# Altium PCB main.PcbDoc
Units mm, origin at the board's own origin, x right, y up, seen from the top; angles counter-clockwise.
Board outline 55.88 x 52.07 mm, 2 copper layers (Top Layer, Bottom Layer); 13 components, 41 nets, 136 pads, 63 vias.
Unrouted connection lines stored in the file: 1.
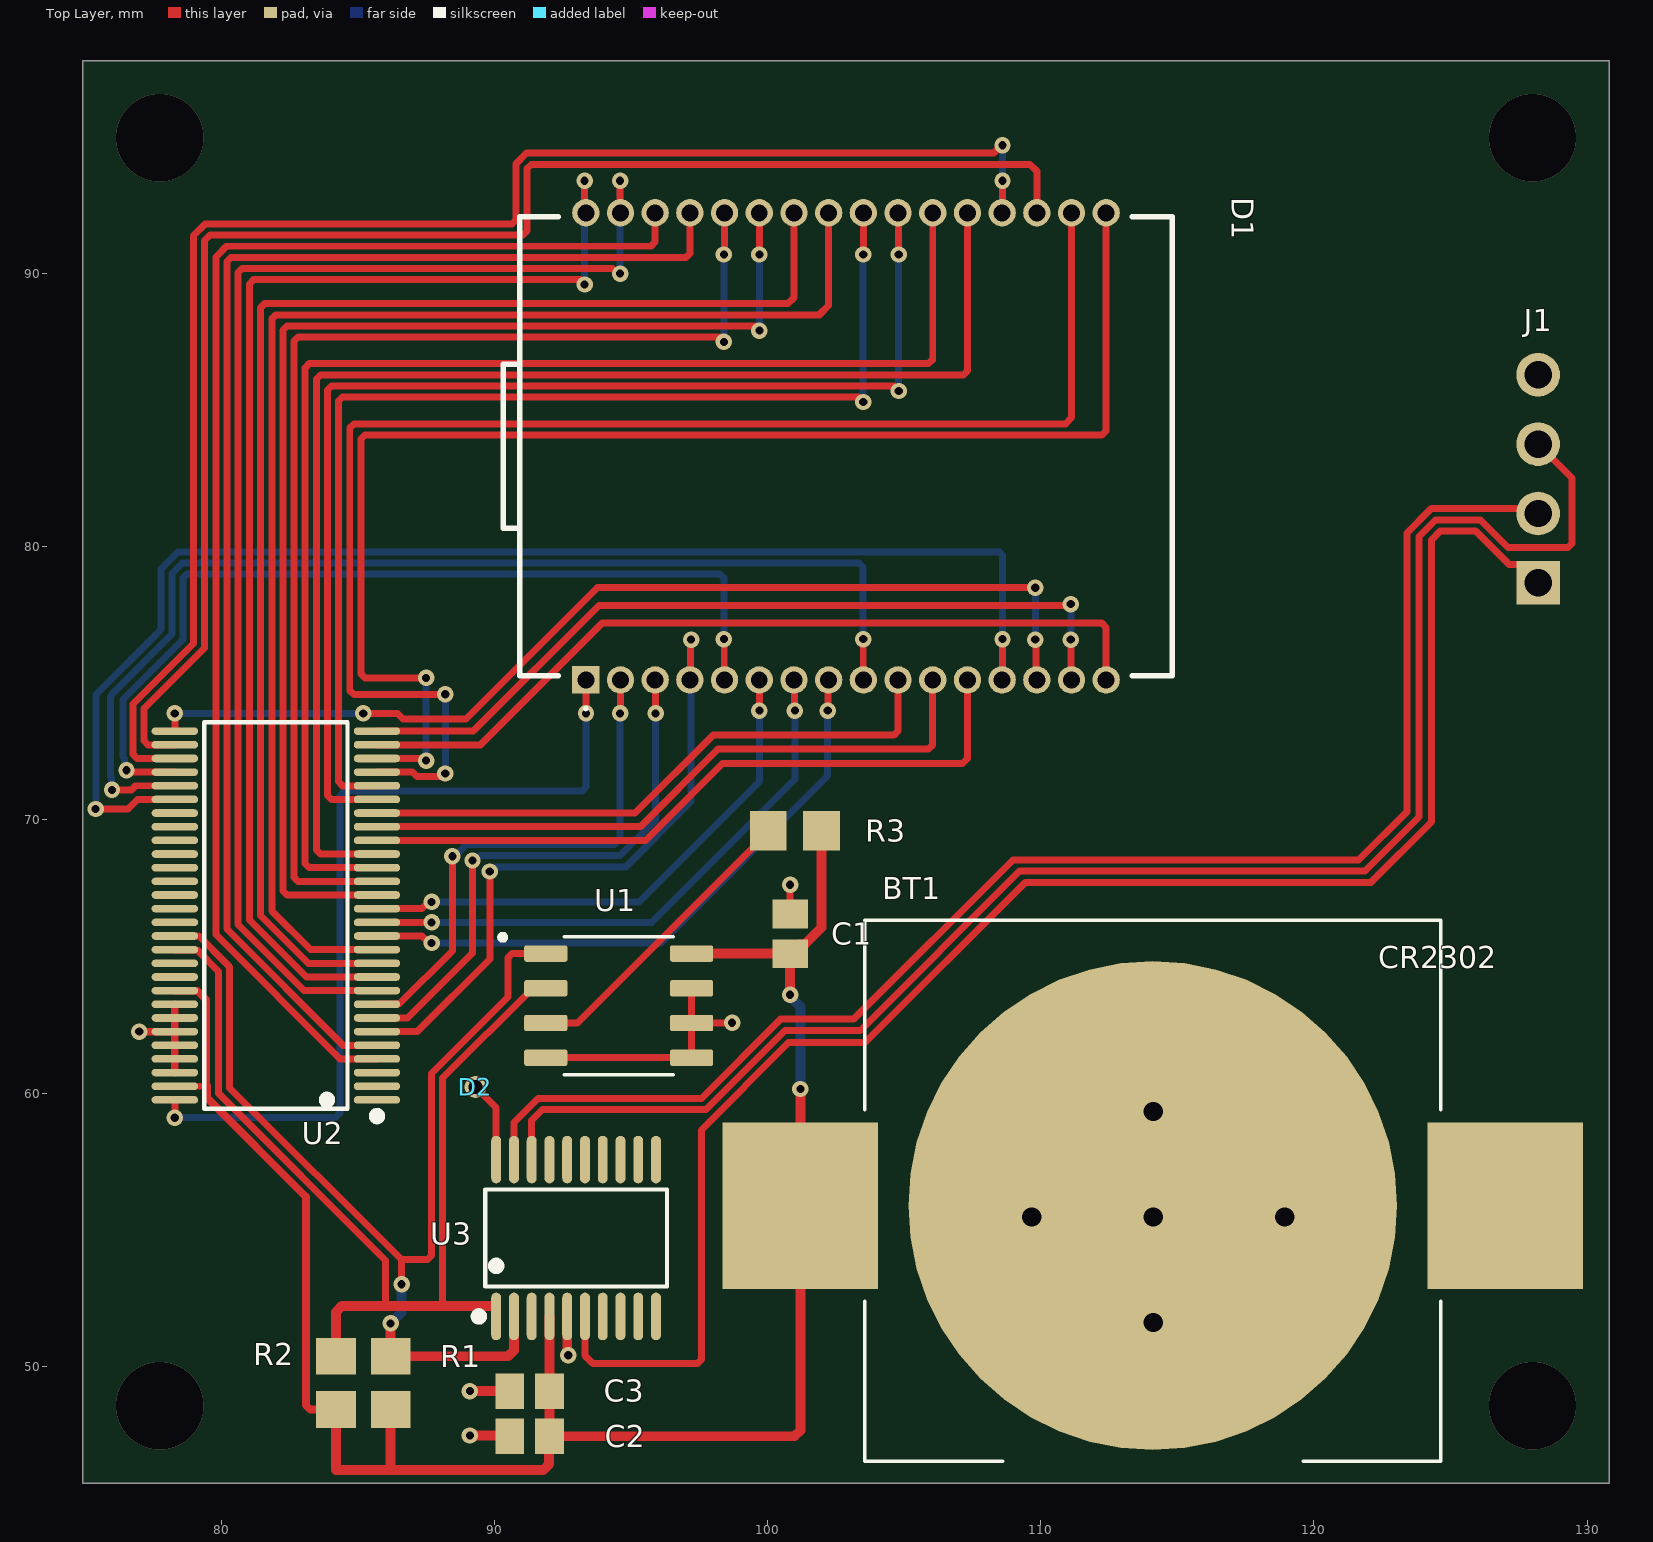
[diagram p0: Top Layer view]
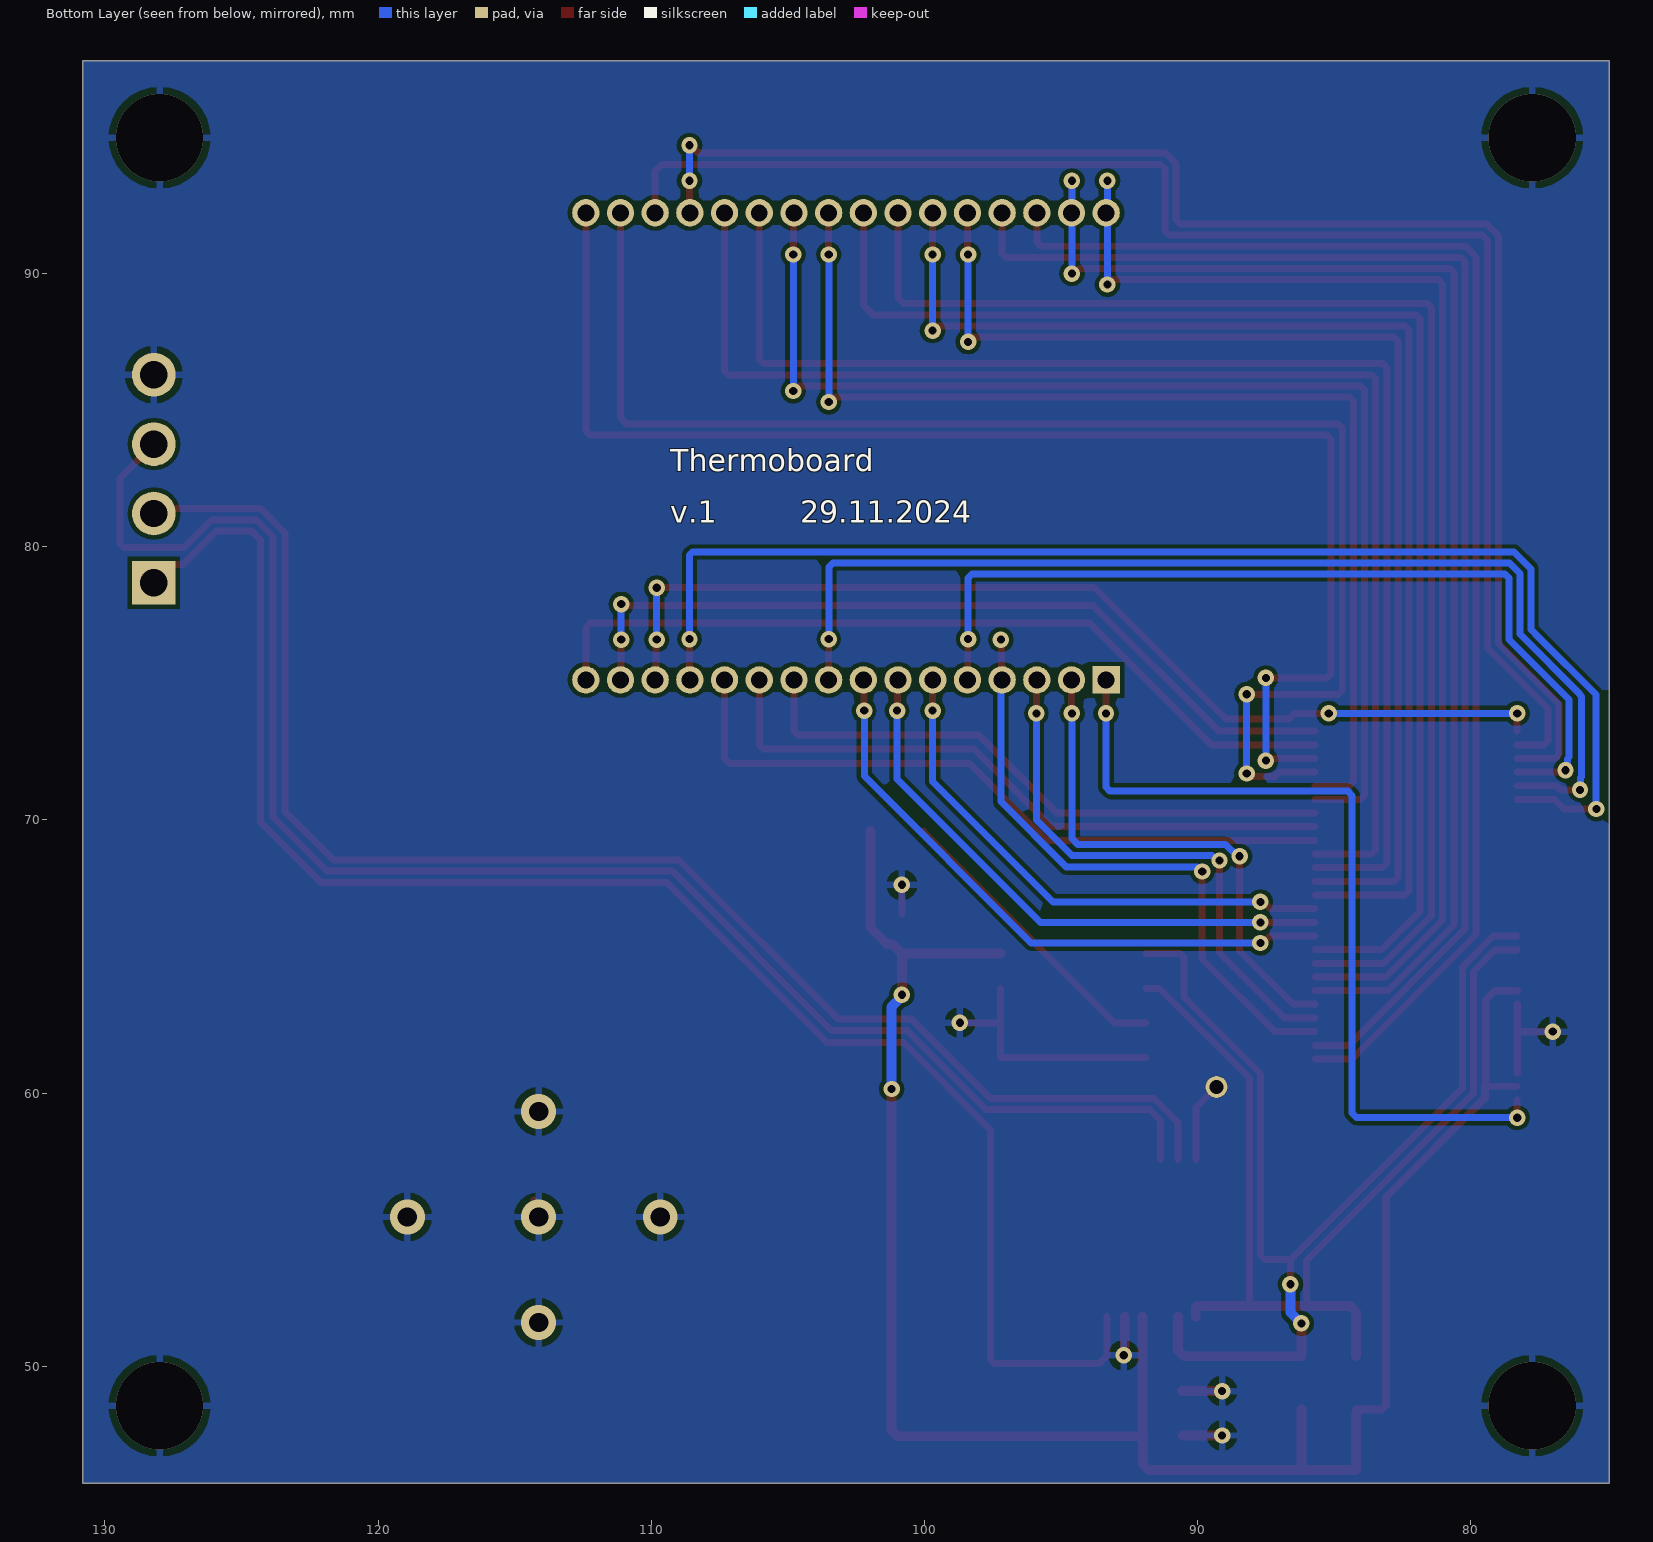
[diagram p1: Bottom Layer view, seen from below]
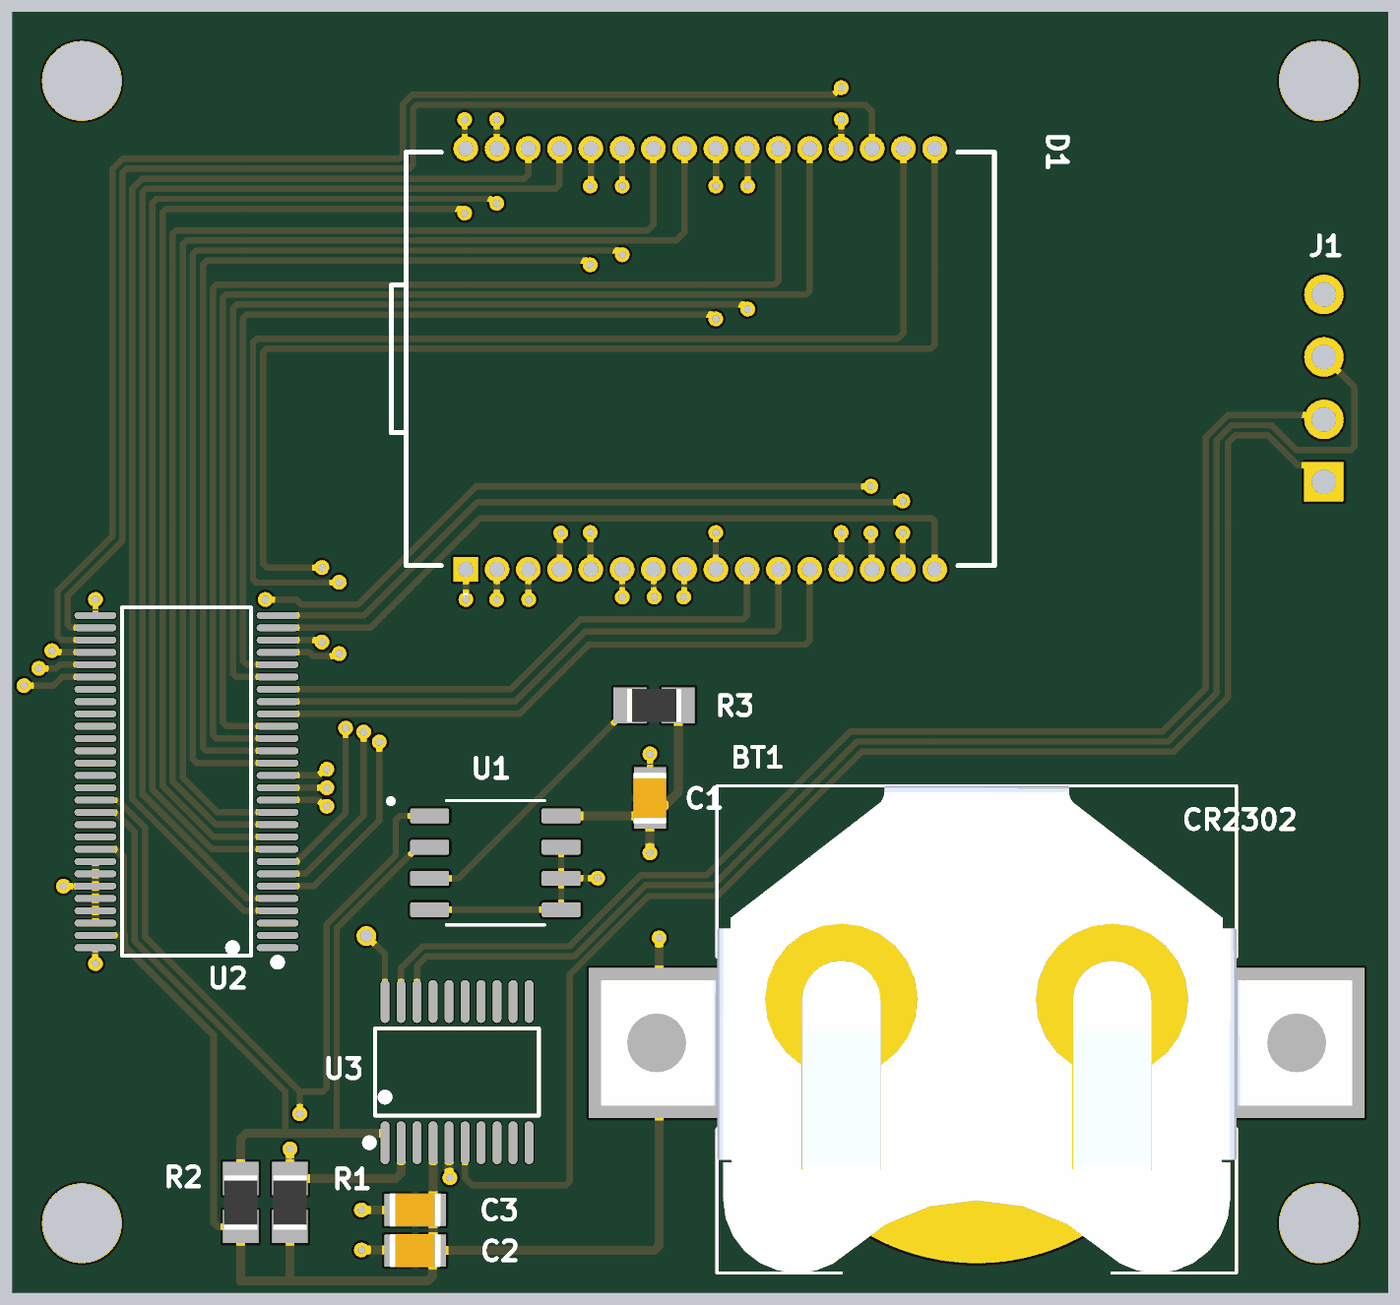
[diagram p2: 3D render of the assembled board from above, using the file's embedded part models]

## Layer stack, top to bottom
Top Solder: solder mask 0.0102, Solder Resist, Dk 3.5
Top Layer: signal copper 0.0356
Dielectric 1: dielectric 0.32, FR-4, Dk 4.8
Bottom Layer: signal copper 0.0356
Bottom Solder: solder mask 0.0102, Solder Resist, Dk 3.5

## Board outline
74.93,45.72 130.81,45.72 130.81,97.79 74.93,97.79

## Design rules (kind name [scope] priority, off if disabled: settings)
Clearance Debug_Pad_Clearance [(HasFootprint('Test Via'))] p1: gap=0 ignorepadtopadclearanceinfootprint=FALSE
Clearance [All] p2: gap=0.152 ignorepadtopadclearanceinfootprint=FALSE
PolygonConnect [All] p1: connectstyle=Relief reliefconductorwidth=0.254 reliefentries=4 polygonreliefangle="90 Angle" airgapwidth=0.254
RoutingVias [All] p1: holewidth=0.3 width=0.6 viastyle="Through Hole" minholewidth=0.3 minwidth=0.6 maxholewidth=0.3 maxwidth=0.6
SolderMaskExpansion [All] p1: expansion=0.102 istentingtop=FALSE
SupplyNets "Schematic Supply Nets_1" [InNet('VCC')] p1: voltage=0.000
SupplyNets "Schematic Supply Nets" [InNet('GND')] p2: voltage=0.000
Width [All] p1: maxlimit=0.6 minlimit=0.254 preferedwidth=0.254
30 further rules are at their usual default settings.

## Components (designator, comment, footprint, x,y, rotation, side; value= is the part's Value field where it differs from the comment)
BT1 "BAT-HLD-003-SMT" BAT_BAT-HLD-003-SMT 114.1,55.88 r0 top
C1 "Capacitor 100 nF +/-10% 50 V 0805" CAPC2013X95X50LL10T25 100.825,65.83 r90 top value=100nF
C2 "4.7uF" CAPC2013X95X50LL10T25 91.289,47.439 r180 top value=100nF
C3 "Capacitor 100 nF +/-10% 50 V 0805" CAPC2013X95X50LL10T25 91.289,49.09 r180 top value=100nF
D1 "LCD Display" DE117RS2075V 93.345,75.125 r0 top
D2 "Test Via" "Test Via" 89.306,60.223 r0 top
J1 "SWD Header" "4-Pin Header TH" 128.27,82.55 r90 top
R1 "Resistor 4k7 +/-1% 0805 125 mW" RESC2013X70X40ML20T20 86.2,49.39 r270 top value=4.7k
R2 "Resistor 4k7 +/-1% 0805 125 mW" RESC2013X70X40ML20T20 84.2,49.39 r270 top value=4.7k
R3 "Resistor 4k7 +/-1% 0805 125 mW" RESC2013X70X40ML20T20 101,69.6 r0 top value=4.7k
U1 "AT30TSE754A-SS8M-T" SOIC127P599X175-8N 94.55,63.2 r0 top
U2 "PCF85176T/1Y" TSSOP-56_L14.0-W6.1-P0.50-LS8.1-BL 82,66.5 r90 top
U3 "STM32C011F6P6" TSSOP-20_L6.5-W4.4-P0.65-LS6.4-BL 92.989,54.694 r0 top

## Footprints (in the part's own frame and the unit in brackets; to place one, negate y for a bottom-side part, rotate by r counter-clockwise, add the part's x,y. Pads: shape width x height; smd on the part's side, far side on the other; paste and mask are expansions set on the pad)
"4-Pin Header TH" [mm] "A Throughole 4 Pin Header"
  rect 1.6x1.6 hole 1: 0(-3.873,0.063)
  round 1.6 hole 1: 1(-1.333,0.063) 2(1.206,0.064) 3(3.746,0.064)
BAT_BAT-HLD-003-SMT [mm]
  round 17.9 smd paste-10: N(0,0)
  rect 5.7x6.1 smd: P1(-12.9,0) P2(12.9,0)
  silkscreen extent -10.55,-9.35 10.55,10.45, body extent -15.25,-9.35 15.25,10.45, height 3.9
CAPC2013X95X50LL10T25 [mm] "Chip Capacitor, 2-Leads, Body 2.10x1.35mm, IPC High Density"
  rect 1.05x1.3 smd: 1(-0.725,0) 2(0.725,0)
  body extent -1.05,-0.67 1.05,0.67, height 0.95
DE117RS2075V [mm]
  rect 1x1 hole 0.62: 1(0,0)
  round 1 hole 0.62: 2(1.27,0) 3(2.54,0) 4(3.81,0) 5(5.08,0) 6(6.35,0) 7(7.62,0) 8(8.89,0) 9(10.16,0) 10(11.43,0) 11(12.7,0) 12(13.97,0) 13(15.24,0) 14(16.51,0) 15(17.78,0) 16(19.05,0) 17(19.05,17.1) 18(17.78,17.1) 19(16.51,17.1) 20(15.24,17.1) 21(13.97,17.1) 22(12.7,17.1) 23(11.43,17.1) 24(10.16,17.1) 25(8.89,17.1) 26(7.62,17.1) 27(6.35,17.1) 28(5.08,17.1) 29(3.81,17.1) 30(2.54,17.1) 31(1.27,17.1) 32(0,17.1)
  silkscreen extent -3.03,-1.1 21.47,16.95
RESC2013X70X40ML20T20 [mm] "Chip Resistor, 2-Leads, Body 2.2x1.35mm, IPC Low Density"
  rect 1.35x1.45 smd: 1(-0.975,0) 2(0.975,0)
  body extent -1.1,-0.67 1.1,0.67, height 0.7
SOIC127P599X175-8N [mm]
  rrect25% 1.58x0.6 smd: 1(-2.67,1.905) 2(-2.67,0.635) 3(-2.67,-0.635) 4(-2.67,-1.905) 5(2.67,-1.905) 6(2.67,-0.635) 7(2.67,0.635) 8(2.67,1.905)
  silkscreen extent -4.35,-2.52 1.99,2.6
"Test Via" [mm] "A test via hole"
  round 0.8 hole 0.5: 1(0,0)
TSSOP-20_L6.5-W4.4-P0.65-LS6.4-BL [mm]
  oval 0.364x1.742 smd paste+0 mask+0.051: 1(-2.925,-2.871) 2(-2.275,-2.871) 3(-1.625,-2.871) 4(-0.975,-2.871) 5(-0.325,-2.871) 6(0.325,-2.871) 7(0.975,-2.871) 8(1.625,-2.871) 9(2.275,-2.871) 10(2.925,-2.871) 11(2.925,2.871) 12(2.275,2.871) 13(1.625,2.871) 14(0.975,2.871) 15(0.325,2.871) 16(-0.325,2.871) 17(-0.975,2.871) 18(-1.625,2.871) 19(-2.275,2.871) 20(-2.925,2.871)
  silkscreen extent -3.71,-3.02 3.33,1.77
TSSOP-56_L14.0-W6.1-P0.50-LS8.1-BL [mm]
  oval 0.28x1.7 smd paste+0 mask+0.051: 1(-6.75,-3.7) 2(-6.25,-3.7) 3(-5.75,-3.7) 4(-5.25,-3.7) 5(-4.75,-3.7) 6(-4.25,-3.7) 7(-3.75,-3.7) 8(-3.25,-3.7) 9(-2.75,-3.7) 10(-2.25,-3.7) 11(-1.75,-3.7) 12(-1.25,-3.7) 13(-0.75,-3.7) 14(-0.25,-3.7) 15(0.25,-3.7) 16(0.75,-3.7) 17(1.25,-3.7) 18(1.75,-3.7) 19(2.25,-3.7) 20(2.75,-3.7) 21(3.25,-3.7) 22(3.75,-3.7) 23(4.25,-3.7) 24(4.75,-3.7) 25(5.25,-3.7) 26(5.75,-3.7) 27(6.25,-3.7) 28(6.75,-3.7) 29(6.75,3.7) 30(6.25,3.7) 31(5.75,3.7) 32(5.25,3.7) 33(4.75,3.7) 34(4.25,3.7) 35(3.75,3.7) 36(3.25,3.7) 37(2.75,3.7) 38(2.25,3.7) 39(1.75,3.7) 40(1.25,3.7) 41(0.75,3.7) 42(0.25,3.7) 43(-0.25,3.7) 44(-0.75,3.7) 45(-1.25,3.7) 46(-1.75,3.7) 47(-2.25,3.7) 48(-2.75,3.7) 49(-3.25,3.7) 50(-3.75,3.7) 51(-4.25,3.7) 52(-4.75,3.7) 53(-5.25,3.7) 54(-5.75,3.7) 55(-6.25,3.7) 56(-6.75,3.7)
  silkscreen extent -7.49,-3.85 7.08,2.62

## Part data
BT1: "Battery Holder Coin 20 SMT Nickel", Package=None, Check_prices=https://www.snapeda.com/parts/BAT-HLD-003-SMT/Linx/view-part/?ref=eda, ComponentLink1Description=Datsheet, ComponentLink1URL=https://www.te.com/commerce/DocumentDelivery/DDEController?Action=srchrtrv&DocNm=BAT-HLD-003-SMT-TR&DocType=Data+Sheet&DocLang=English&DocFormat=pdf&PartCntxt=BAT-HLD-003-SMT-TR, MF="Linx Technologies Inc.", MP=BAT-HLD-003-SMT, SnapEDA_Link=https://www.snapeda.com/parts/BAT-HLD-003-SMT/Linx/view-part/?ref=snap
C1 C3: library part CMP-001-00018-6, "Chip Capacitor, 100 nF, +/- 10%, 50 V, 0805 (2012 Metric)", Capacitor Type=Ceramic, Case/Package=0805, Max Operating Temperature=125°C, Min Operating Temperature=-55°C, Tolerance=10%, Voltage Rating=50V, Mounting Technology=SM, Pins=2, RoHS Compliant=True
C2: library part CMP-001-00018-6, Capacitor Type=Ceramic, Case/Package=0805, Max Operating Temperature=125°C, Min Operating Temperature=-55°C, Tolerance=10%, Voltage Rating=50V, Mounting Technology=SM, Pins=2, RoHS Compliant=True
D1: library part DE117RS21, "A 4 digit LCD Display with 4 Backplanes and no Backlight running at very low current (2uA/cm^2)", ComponentLink1Description=Datasheet, ComponentLink1URL=https://cdn-reichelt.de/documents/datenblatt/C700/DE117RS2075.pdf
D2: "Test via hole"
R1 R2 R3: library part CMP-009-00032-5, "Chip Resistor, 4.7 KOhm, +/- 1%, 0.125 W, -55 to 155 degC, 0805 (2012 Metric)", Case/Package=0805, Max Operating Temperature=155°C, Min Operating Temperature=-55°C, Power=125mW, Tolerance=1%, Voltage Rating=150V, Mounting Technology=SM, Pins=2, RoHS Compliant=True
U1: "Temperature Sensor", Package=None, Availability=Unavailable, ComponentLink1Description=Datasheet, ComponentLink1URL=https://cdn-reichelt.de/documents/datenblatt/A200/AT30TSE752A-SS8M-B_ENG_TDS.pdf, MP=AT30TSE754A-SS8M-T, Price=None
U2: "40x4 Universal LCD Driver", JLCPCB Part Class="Extended Part", Manufacturer=NXP(恩智浦), Operating Current=3.5uA, Operating Temperature=-40℃~+85℃, Operating Voltage=1.8V~5.5V, Add into BOM=yes, ComponentLink1Description=Datasheet, ComponentLink1URL=https://www.mouser.de/datasheet/2/302/PCF85176-2539777.pdf, Convert to PCB=yes, Datasheet=https://www.mouser.de/datasheet/2/302/PCF85176-2539777.pdf, Device=PCF85176T/1Y, Display Configurations=40段, Interface=I2C, LCSC Part Name=PCF85176T/1Y, Manufacturer Part=PCF85176T/1Y, Supplier=LCSC, Supplier Footprint=TFSOP-56-6.1mm, Supplier Part=C3194505, Symbol=PCF85176T/1Y
U3: "Microcontroller", JLCPCB Part Class="Extended Part", Manufacturer=ST(意法半导体), Add into BOM=yes, ComponentLink1Description=Datasheet, ComponentLink1URL=https://www.st.com/resource/en/datasheet/stm32c011d6.pdf, Convert to PCB=yes, Datasheet=https://www.st.com/resource/en/datasheet/stm32c011d6.pdf, Device=STM32C011F6P6, LCSC Part Name=STM32C011F6P6, Manufacturer Part=STM32C011F6P6, Supplier=LCSC, Supplier Footprint=TSSOP-20, Supplier Part=C5456198, Symbol=STM32C011F6P6

## Via types
v1: diameter 0.6, hole 0.3, Top Layer to Bottom Layer, 54 vias
v2: diameter 1.27, hole 0.711, Top Layer to Bottom Layer, 5 vias
v3: diameter 3.2, hole 3.2, Top Layer to Bottom Layer, 4 vias

## Nets (pads, with @x,y where several pads share a name; then routed paths per layer and width w, separated by ;. In a path a pad name is that pad's centre, name@x,y a point inside that pad or via, vN(x,y) a via of type N, cw(c..) or ccw(c..) an arc to the next point about the centre after c; other vN are vias at no path point)
1A: D1.30 U2.4 | length 50
  Top Layer w0.256: U2.4 84.351,61.25 79.8,65.801 79.8,90.611 80.189,91 95.735,91 95.885,91.15 D1.30
1B: D1.29 U2.5 | length 50.2
  Top Layer w0.256: U2.5 84.458,61.75 80.208,66 80.208,90.442 80.358,90.592 97.005,90.592 97.155,90.742 D1.29
1C: D1.4 U2.6 | length 22.8
  Top Layer w0.256: U2.6 87.175,62.25 89.832,64.907 v1(89.832,68.109) ; D1.4 97.178,75.148 97.178,76.577 v1(97.2,76.6)
  Bottom Layer w0.256: v1(89.832,68.109) 90.004,68.281 94.809,68.281 97.2,70.673 D1.4@97.2,75.125
1D: D1.3 U2.7 | length 20.3
  Top Layer w0.254: U2.7 86.825,62.75 89.198,65.123 v1(89.198,68.516) ; D1.3 95.893,75.118 95.893,73.908 v1(95.9,73.9)
  Bottom Layer w0.254: v1@89.245,68.469 89.476,68.7 94.6,68.7 95.9,70 v1(95.9,73.9)
1E: D1.2 U2.8 | length 19.3
  Top Layer w0.254: U2.8 85.705,63.255 86.508,63.255 88.462,65.209 v1(88.462,68.67) ; v1(94.6,73.9) 94.607,73.908 94.607,75.118 D1.2
  Bottom Layer w0.254: v1(88.462,68.67) 88.533,68.67 88.97,69.106 94.387,69.106 94.6,69.319 v1(94.6,73.9)
1F: D1.31 U2.9 | length 48.5
  Top Layer w0.256: U2.9 83.036,63.75 80.617,66.169 80.617,90.033 80.767,90.183 94.324,90.183 94.507,90 v1(94.6,90) ; D1.31@94.6,92.24 v1(94.6,93.4)
  Bottom Layer w0.256: v1(94.6,90) v1@94.6,93.3
1G: D1.32 U2.10 | length 46.2
  Top Layer w0.256: U2.10 83.113,64.25 81.032,66.332 81.032,89.625 81.182,89.775 v1@93.1,89.775 ; v1@93.15,89.775 93.3,89.625 v1(93.3,89.6) ; v1(93.3,93.4) 93.3,92.27 D1.32
  Bottom Layer w0.256: v1(93.3,89.6) v1(93.3,93.4)
2A: D1.26 U2.11 | length 50
  Top Layer w0.256: U2.11 83.191,64.75 81.44,66.501 81.44,88.75 81.59,88.9 100.75,88.9 100.965,89.115 D1.26
2B: D1.25 U2.12 | length 49.9
  Top Layer w0.256: U2.12 83.269,65.25 81.849,66.67 81.849,88.342 81.999,88.492 101.892,88.492 102.235,88.835 D1.25@102.235,92.075
2C: D1.8 U2.13 | length 22.7
  Top Layer w0.254: U2.13 87.352,65.75 87.606,65.495 v1(87.7,65.495) ; v1(102.2,74) 102.217,74.017 102.217,75.108 D1.8
  Bottom Layer w0.254: v1(87.7,65.495) 96.095,65.495 102.2,71.6 v1(102.2,74)
2D: D1.7 U2.14 | length 21.1
  Top Layer w0.254: U2.14 85.701,66.249 87.699,66.249 v1(87.7,66.248) ; D1.7 100.983,75.108 100.983,74.017 v1(101,74)
  Bottom Layer w0.254: v1(87.7,66.248) 95.748,66.248 101,71.5 v1(101,74)
2E: D1.6 U2.15 | length 19.7
  Top Layer w0.254: U2.15 87.356,66.75 87.606,67 v1(87.7,67) ; D1.6 99.698,75.122 99.698,74.002 v1(99.7,74)
  Bottom Layer w0.254: v1(87.7,67) 95.3,67 99.7,71.4 v1(99.7,74)
2F: D1.27 U2.16 | length 46.1
  Top Layer w0.256: U2.16 82.407,67.25 82.257,67.4 82.257,87.933 82.407,88.083 99.55,88.083 99.7,87.933 v1(99.7,87.911) 99.7,87.9 v1@99.8,87.8 ; v1(99.7,90.7) D1.27@99.7,92.22
  Bottom Layer w0.256: v1(99.7,87.911) v1(99.7,90.7)
2G: D1.28 U2.17 | length 43.3
  Top Layer w0.256: U2.17 82.815,67.75 82.665,67.9 82.665,87.525 82.815,87.675 98.25,87.675 98.4,87.525 v1(98.4,87.5) ; v1(98.4,90.7) 98.425,90.725 D1.28
  Bottom Layer w0.256: v1(98.4,87.5) v1(98.4,90.7)
3A: D1.22 U2.18 | length 49.3
  Top Layer w0.254: U2.18 83.222,68.25 83.073,68.399 83.073,86.551 83.222,86.7 105.896,86.7 106.045,86.849 D1.22
3B: D1.21 U2.19 | length 49.3
  Top Layer w0.254: U2.19 83.628,68.75 83.479,68.899 83.479,86.145 83.628,86.294 107.166,86.294 107.315,86.442 D1.21
3C: D1.12 U2.20 | length 25.7
  Top Layer w0.256: U2.20 95.529,69.25 98.343,72.063 107.128,72.063 107.315,72.25 D1.12
3D: D1.11 U2.21 | length 24
  Top Layer w0.256: U2.21 95.342,69.75 98.184,72.592 105.895,72.592 106.045,72.742 D1.11
3E: D1.10 U2.22 | length 22.2
  Top Layer w0.256: U2.22 95.15,70.25 98,73.1 104.625,73.1 104.775,73.25 D1.10
3F: D1.23 U2.23 | length 44.4
  Top Layer w0.256: U2.23 84.037,70.75 83.887,70.9 83.887,85.736 84.037,85.886 104.65,85.886 104.8,85.736 v1(104.8,85.7) ; D1.23 104.8,92.2 v1(104.8,90.7)
  Bottom Layer w0.256: v1(104.8,85.7) v1(104.8,90.7) v1@104.8,90.8
3G: D1.24 U2.24 | length 41.7
  Top Layer w0.256: U2.24 84.445,71.25 84.295,71.4 84.295,85.328 84.445,85.478 103.35,85.478 103.5,85.328 v1(103.5,85.3) ; v1@103.505,90.705 D1.24
  Bottom Layer w0.256: v1(103.5,85.3) v1(103.5,90.7)
4A: D1.18 U2.25 | length 52.8
  Top Layer w0.256: U2.25 87,71.75 87.161,71.589 87.996,71.589 88.107,71.7 v1(88.2,71.7) ; v1(88.2,74.6) 88.185,74.585 84.853,74.585 84.703,74.735 84.703,84.35 84.853,84.5 110.9,84.5 111.125,84.725 D1.18
  Bottom Layer w0.256: v1(88.2,71.7) v1@88.2,74.585
4B: D1.17 U2.26 | length 51.3
  Top Layer w0.256: U2.26 87.326,72.25 87.407,72.17 v1(87.5,72.17) ; v1(87.5,75.2) 85.262,75.2 85.112,75.35 85.112,83.942 85.262,84.092 112.245,84.092 112.395,84.242 D1.17
  Bottom Layer w0.256: v1(87.5,72.17) v1(87.5,75.2)
4C: D1.16 U2.27 | length 30.5
  Top Layer w0.256: U2.27 89.486,72.75 93.936,77.2 112.245,77.2 112.395,77.05 D1.16
4D: D1.15 U2.28 | length 30.1
  Top Layer w0.254: U2.28 89.225,73.25 93.824,77.849 111.1,77.85 v1(111.1,77.9) ; v1(111.1,76.6) 111.1,75.15 D1.15
  Bottom Layer w0.254: v1(111.1,76.6) v1(111.1,77.9)
4E: D1.14 U2.29 | length 37.6
  Top Layer w0.254: U2.29 v1(78.3,73.9) ; v1(85.2,73.9) 86.459,73.9 86.659,73.7 88.965,73.7 93.765,78.5 v1(109.8,78.5) ; v1(109.8,76.6) 109.827,76.572 109.827,75.507 109.827,75.153 D1.14
  Bottom Layer w0.254: v1(78.3,73.9) v1(85.2,73.9) ; v1(109.8,76.6) v1(109.8,78.5)
4F: D1.19 U2.30 | length 55
  Top Layer w0.254: U2.30 77.319,72.75 77.171,72.899 77.171,74.071 79.393,76.293 79.393,91.218 79.582,91.407 91.051,91.407 91.2,91.556 91.2,93.851 91.349,94 109.6,94 109.855,93.745 D1.19
4G: D1.20 U2.31 | length 56.2
  Top Layer w0.254: U2.31 78.295,72.255 76.913,72.255 76.764,72.404 76.764,74.239 78.986,76.461 78.986,91.387 79.024,91.425 ; 79.025,91.425 79.414,91.814 90.645,91.814 90.794,91.963 90.794,94.02 91.18,94.406 108.278,94.406 108.572,94.7 v1(108.6,94.7) ; D1.20@108.6,92.24 v1(108.6,93.4)
  Bottom Layer w0.254: v1(108.6,93.4) v1(108.6,94.7)
BP: D1.1 U2.56 | length 31.4
  Top Layer w0.256: v1(78.3,59.1) U2.56 ; D1.1@93.342,75.122 93.346,75.119 93.346,73.904 v1(93.35,73.9)
  Bottom Layer w0.256: v1(78.3,59.1) 84.175,59.1 84.35,59.275 84.35,70.9 84.5,71.05 93.2,71.05 93.35,71.2 v1(93.35,73.9)
DP1: D1.5 U2.32 | length 33.5
  Top Layer w0.254: v1(76.53,71.82) 76.623,71.82 76.694,71.75 U2.32 ; v1(98.4,76.62) 98.413,76.607 98.413,75.138 D1.5 D1.5@98.413,75.113
  Bottom Layer w0.254: v1(76.53,71.82) 76.464,71.887 76.464,72.236 76.4,72.3 76.4,74.4 78.6,76.6 78.6,76.625 78.606,76.632 78.606,78.851 78.755,79 98.251,79 98.4,78.851 v1(98.4,76.62)
DP2: D1.9 U2.33 | length 41
  Top Layer w0.254: v1@75.9,71.1 v1(76,71.1) 76.711,71.1 76.861,71.25 U2.33 ; v1(103.5,76.62) 103.501,76.618 103.501,75.124 103.502,75.122 D1.9
  Bottom Layer w0.254: v1(76,71.1) 75.988,71.112 75.988,71.543 75.95,71.58 75.95,74.525 76,74.575 76,74.6 78.2,76.8 78.2,79.02 78.587,79.406 103.351,79.406 103.5,79.258 v1(103.5,76.62)
DP3: D1.13 U2.34 | length 48.5
  Top Layer w0.256: v1(75.4,70.4) 76.587,70.4 76.937,70.75 U2.34 ; D1.13@108.6,75.14 v1(108.6,76.62)
  Bottom Layer w0.256: v1(75.4,70.4) 75.42,70.42 75.42,74.596 77.512,76.688 77.793,76.969 77.793,79.188 78.418,79.814 108.486,79.814 108.6,79.7 v1(108.6,76.62)
GND: BT1.N C1.2 C2.2 C3.2 J1.3 U1.4 U1.5 U1.6 U1.7 U2.49 U2.50 U2.51 U2.52 U2.53 U2.54 U3.5 | length 18.7
  Top Layer w0.254: C2.2@90.539,47.465 C2.2 ; U1.4 U1.5 U1.6 ; U1.7 U1.6 ; v1(98.7,62.575) 98.695,62.57 97.225,62.57 U1.6 ; C1.2 v1(100.825,67.625) ; BT1.N BT1.N@114.3,56.08
  Top Layer w0.28: v1(77,62.25) U2.51 ; U2.54 U2.53 U2.52 U2.51 ; U2.49 U2.50 U2.51
  Top Layer w0.36: v1(89.103,47.465) C2.2@90.539,47.465 ; v1@89.306,49.09 C3.2 ; U3.5@92.665,51.822 92.665,50.435 v1(92.7,50.4)
  other v1: 89.103,49.09
  other v2: 114.125,51.6 109.675,55.463 114.125,55.463 118.925,55.463 114.125,59.325
  other v3: 77.75,48.55 128,48.55 77.75,94.975 128,94.975
I2C_SCL: R2.1 U1.2 U2.45 U3.1 | length 38.1
  Top Layer w0.254: 88.1,52.2 88.1,60.545 91.39,63.835 U1.2
  Top Layer w0.256: U2.45 78.305,65.245 79.109,65.245 79.9,64.454 79.9,59.993 86.02,53.874 86.02,52.22 86,52.2
  Top Layer w0.36: R2.1 84.2,51.989 84.411,52.2 86,52.2 88.1,52.2 90.014,52.2 90.064,52.149 U3.1
I2C_SDA: R1.1 U1.1 U2.44 U3.2 | length 40
  Top Layer w0.256: U2.44 78.305,65.745 79.187,65.745 80.2,64.732 80.308,64.624 80.308,60.192 86.6,53.9 ; v1(86.6,53) 86.6,53.9 ; U1.1 90.65,65.105 90.5,64.955 90.5,63.521 87.693,60.714 87.693,54.05 87.543,53.9 86.6,53.9
  Top Layer w0.36: v1(86.2,51.568) R1.1 90.503,50.365 90.714,50.576 U3.2
  Bottom Layer w0.36: v1(86.2,51.568) 86.6,51.968 v1(86.6,53)
NetD2_1: D2.1 U3.20 | length 3
  Top Layer w0.254: D2.1 90.064,59.465 U3.20
NetR3_1: R3.1 U1.3 | length 11.1
  Top Layer w0.254: U1.3@91.915,62.6 U1.3 93.04,62.565 100.025,69.55 R3.1
RST: J1.0 U3.6 | length 61
  Top Layer w0.256: U3.6 93.315,50.385 93.6,50.1 97.425,50.1 97.575,50.25 97.575,58.65 100.77,61.845 103.565,61.845 109.438,67.717 122.092,67.717 124.3,69.925 124.3,80.25 124.625,80.575 125.922,80.575 127.149,79.349 127.534,79.349 J1.0 128.225,78.658 J1.0@128.225,78.5
SWCLK: J1.1 U3.19 | length 54.2
  Top Layer w0.256: U3.19 90.714,58.928 91.595,59.808 97.578,59.808 100.473,62.703 103.151,62.703 108.982,68.534 121.636,68.534 123.4,70.298 123.4,80.505 124.295,81.4 127.95,81.4 J1.1@128.15,81.2
SWDIO: J1.2 U3.18 | length 59.2
  Top Layer w0.256: U3.18 91.364,59 91.764,59.4 97.747,59.4 100.642,62.295 103.395,62.295 109.226,68.126 121.864,68.126 123.85,70.111 123.85,80.378 124.456,80.983 126.092,80.983 127.1,79.975 129.3,79.975 129.45,80.125 129.45,82.513 128.263,83.7 J1.2@128.2,83.7
VCC: BT1.P1 BT1.P2 C1.1 C2.1 C3.1 R1.2 R2.2 R3.2 U1.8 U2.48 U2.55 U3.4 | length 73.1
  Top Layer w0.254: U2.55 79.4,60.25 79.45,60.3
  Top Layer w0.28: U2.48 79.122,63.75 79.45,63.422 79.45,60.3 79.48,60.27 79.48,59.819 83.1,56.199 83.1,48.579 83.264,48.415 R2.2
  Top Layer w0.36: R2.2@84.2,48.225 84.2,46.2 86.1,46.2 ; R1.2 86.2,46.3 86.1,46.2 ; U3.4 C3.1 C2.1 ; U1.8 C1.1 ; v1(100.825,63.6) C1.1 ; v1(101.2,60.15) BT1.P1 101.2,47.65 100.989,47.439 C2.1 ; R3.2 101.975,66.06 101.365,65.45 101.17,65.45 C1.1 ; 86.1,46.2 91.789,46.2 92,46.411 92,47.425 C2.1
  Bottom Layer w0.36: v1(100.825,63.6) 100.825,63.535 101.2,63.16 v1(101.2,60.15)
pads on no net: U2.1 U2.2 U2.3 U2.35 U2.36 U2.37 U2.38 U2.39 U2.40 U2.41 U2.42 U2.43 U2.46 U2.47 U3.3 U3.7 U3.8 U3.9 U3.10 U3.11 U3.12 U3.13 U3.14 U3.15 U3.16 U3.17

## Polygon pours and split planes (outlines as drawn)
GND on Bottom Layer "GND_L02_P000" (solid, pour order 0): 74.93,45.72 130.81,45.72 130.81,97.79 74.93,97.79

## Silkscreen, mask and mechanical layers (free items; w line width, h text height)
Top Overlay:
  text "CR2302" at 122.351,64.57 h0.8
Bottom Overlay:
  text "Thermoboard" at 109.298,82.77 h0.8
  text "29.11.2024" at 104.539,80.87 h0.8
  text "v.1" at 109.298,80.87 h0.8
Top Courtyard:
  the board outline again, w0.254